# Altium PCB gyro_board.PcbDoc
Units mil, origin at the board's own origin, x right, y up, seen from the top; angles counter-clockwise.
Board outline 444 x 440 mil, 2 copper layers (Top Layer, Bottom Layer); 11 components, 12 nets, 54 pads, 12 vias.
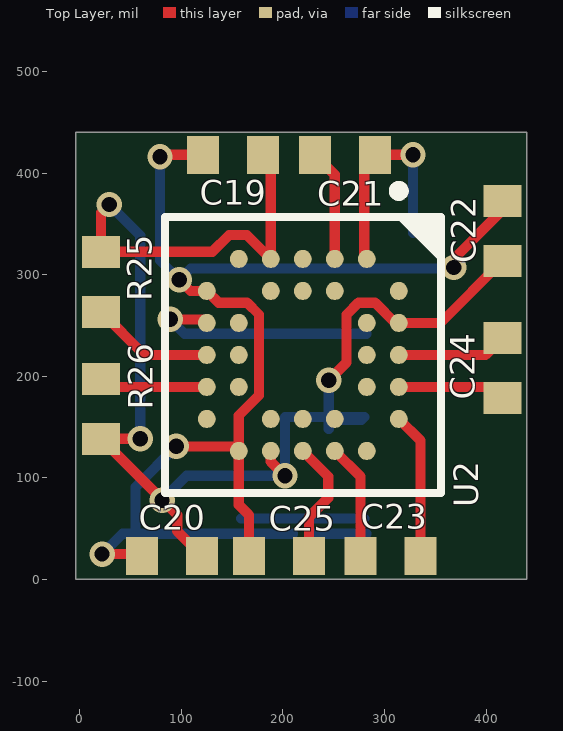
[diagram p0: Top Layer view]
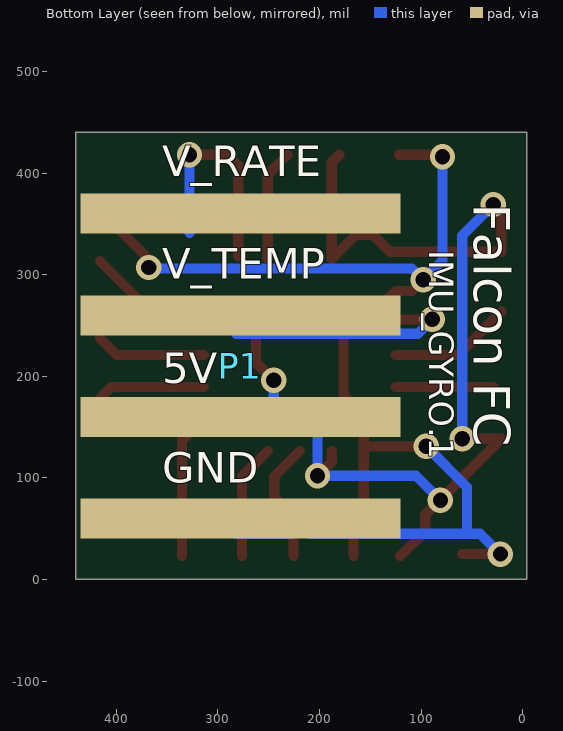
[diagram p1: Bottom Layer view, seen from below]

## Layer stack, top to bottom
Top Layer: signal copper 1.4
Dielectric: dielectric 12.6, FR-4, Dk 4.8
Bottom Layer: signal copper 1.4

## Board outline
440,0 440,440 -4,440 -4,0

## Design rules (kind name [scope] priority, off if disabled: settings)
Clearance [All] p1: gap=6
HoleSize [All] p1: absolutevalues=TRUE maxlimit=100 minlimit=15 maxpercent=80.000 minpercent=20.000
HoleToHoleClearance [All] p1: gap=6 allowstackedmicrovias=TRUE
PlaneConnect [All] p1: planeconnectstyle=Direct reliefexpansion=20 reliefentries=4 reliefconductorwidth=10 reliefairgap=10
PolygonConnect [All] p1: connectstyle=Direct reliefconductorwidth=10 reliefentries=4 polygonreliefangle="90 Angle"
RoomDefinition U_gyro [InComponentClass('U_gyro')] p1: confinementstyle=ConfineIn formatcopy=TRUE lockcomponents=FALSE outline -4,440 -4,0 440,0 440,440
RoomDefinition gyro_board [InComponentClass('gyro_board')] p2: confinementstyle=ConfineIn formatcopy=TRUE lockcomponents=FALSE outline 440,0 440,440 -4,440 -4,0
RoutingVias [All] p1: holewidth=15 width=25 viastyle="Through Hole" minholewidth=15 minwidth=25 maxholewidth=100 maxwidth=200
SilkToSilkClearance [All] p1: silktosilkclearance=0
SilkscreenOverComponentPads [All] p1: minsilkscreentomaskgap=0
SolderMaskExpansion [All] p1: expansion=4
Width [All] p1: maxlimit=100 minlimit=6 preferedwidth=10
23 further rules are at their usual default settings.

## Classes and differential pairs
component class U_gyro: C19 C20 C21 C22 C23 C24 C25 R25 R26 U2
component class gyro_board: P1

## Components (designator, comment, footprint, x,y, rotation, side; value= is the part's Value field where it differs from the comment)
C19 "Capacitor" "0603 (1608)" 151,418 r180 top
C20 "Capacitor" "0603 (1608)" 91,23 r180 top
C21 "Capacitor" "0603 (1608)" 261,418 r0 top
C22 "Capacitor" "0603 (1608)" 416,343 r90 top
C23 "Capacitor" "0603 (1608)" 306,23 r180 top
C24 "Capacitor" "0603 (1608)" 416,208 r270 top
C25 "Capacitor" "0603 (1608)" 196,23 r180 top
P1 "Header 4" gyro_connect 278,360 r270 bottom
R25 "ST Jumper" "0603 (1608)" 21,293 r90 top
R26 "ST Jumper" "0603 (1608)" 21,168 r270 top
U2 "ADXRS620" BGA_AXDR 219.5,220.99 r270 top

## Footprints (in the part's own frame and the unit in brackets; to place one, negate y for a bottom-side part, rotate by r counter-clockwise, add the part's x,y. Pads: shape width x height; smd on the part's side, far side on the other; paste and mask are expansions set on the pad)
"0603 (1608)" [mm] "Chip 2-Leads 0603 (1608)"
  rect 0.8x0.95 smd mask+0: 1(-0.75,0) 2(0.75,0)
  body extent -0.77,-0.43 0.77,0.43, height 0.55
BGA_AXDR [mm] "From AXDRS622 Datasheet"
  round 0.45 smd: A2(-1.6,2.4) A3(-0.8,2.4) A4(0,2.4) A5(0.8,2.4) A6(1.6,2.4) B1(-2.4,1.6) B3(-0.8,1.6) B4(0,1.6) B5(0.8,1.6) B7(2.4,1.6) C1(-2.4,0.8) C2(-1.6,0.8) C6(1.6,0.8) C7(2.4,0.8) D1(-2.4,0) D2(-1.6,0) D6(1.6,0) D7(2.4,0) E1(-2.4,-0.8) E2(-1.6,-0.8) E6(1.6,-0.8) E7(2.4,-0.8) F1(-2.4,-1.6) F3(-0.8,-1.6) F4(0,-1.6) F5(0.8,-1.6) F7(2.4,-1.6) G2(-1.6,-2.4) G3(-0.8,-2.4) G4(0,-2.4) G5(0.8,-2.4) G6(1.6,-2.4)
  silkscreen extent -4.22,-3.45 3.45,3.45, body extent -3.45,-3.45 3.45,3.45, height 3.8
gyro_connect [mm] "the sides of male header pins (100mil pitch) will be soldered to the gyro board to attach it"
  rect 1x8 smd mask+0.051: 1(0,0) 2(2.54,0) 3(5.08,0) 4(7.62,0)

## Part data
P1: "Header, 4-Pin"
R25 R26: library part Res1, "Resistor"

## Via types
v1: diameter 25, hole 15, Top Layer to Bottom Layer, tented both sides, 12 vias

## Nets (pads, with @x,y where several pads share a name; then routed paths per layer and width w, separated by ;. In a path a pad name is that pad's centre, name@x,y a point inside that pad or via, vN(x,y) a via of type N, cw(c..) or ccw(c..) an arc to the next point about the centre after c; other vN are vias at no path point)
5V: C19.1 C20.1 C22.1 P1.3 R25.2 R26.2 U2.A3 U2.E1 U2.E7 | length 1419.1
  Top Layer w10: v1(29,369) 21,361 R25.2 130.53,322.53 147,339 164.49,339 U2.E1 188.01,410.52 C19.1 ; v1(59.47,138.47) R26.2 95.94,63.53 95.94,47.58 C20.1 ; U2.E7 188.01,115.99 v1(202,102) ; v1(245,196) 262.64,213.64 262.64,260.71 274.27,272.35 290.72,272.35 U2.A3@310.58,252.49 ; U2.A3 355.02,252.49 C22.1
  Bottom Layer w10: v1(29,369) 59.47,338.53 v1(59.47,138.47) ; v1(81,78) 105,102 v1(202,102) 202,160 P1.3@245,160 ; P1.3@245,148 P1.3@245,157 ; v1(245,196) P1.3@245,160 ; P1.3@245,157 P1.3@245,160 ; P1.3@245,157 277,157 280,160 P1.3 P1.3@245,160
AGND: C19.2 C20.2 C22.2 C25.2 P1.4 U2.F7 U2.G2 | length 1454.1
  Top Layer w10: v1(22,25) C20.2@59.47,25 ; v1(79,416) 81,418 C19.2 ; v1(95,131) 152.02,131 U2.F7 ; v1(98,295) 109.02,283.98 U2.G2 136.65,272.35 164.74,272.35 176.37,260.71 176.37,181.27 156.51,161.41 U2.F7 ; C25.2 166.47,63.53 156.51,73.49 U2.F7 ; v1(368,307) 368,315.48 416,363.48 C22.2
  Bottom Layer w10: v1(22,25) 42,45 55,45 ; v1(79,416) 79,314 v1(98,295) ; v1(95,131) 55,91 55,45 ; v1@101,292 v1(98,295) ; P1.4@159,60 P1.4 P1.4@280,60 ; P1.4@210,45 55,45 ; P1.4@228,45 P1.4@282,45 ; v1(368,307) 367,306 109,306 v1(98,295)
NetC21_1: C21.1 U2.C1 | length 110.6
  Top Layer w10: C21.1 251,398.47 U2.C1
NetC23_1: C23.1 U2.A6 | length 143.9
  Top Layer w10: U2.A6 335.53,136.46 C23.1
NetC23_2: C23.2 U2.C7 | length 114.1
  Top Layer w10: U2.C7 276.47,101.03 C23.2
NetC24_1: C24.1 U2.A4 | length 108.9
  Top Layer w10: U2.A4 399.46,220.99 C24.1
NetC24_2: C24.2 U2.A5 | length 106.6
  Top Layer w10: U2.A5 404.98,189.5 C24.2
NetC25_1: C25.1 U2.D7 | length 121.8
  Top Layer w10: U2.D7 244.6,101.41 244.6,80.27 225.53,61.19 C25.1
NetR25_1: R25.1 U2.G4 | length 121.6
  Top Layer w10: R25.1 63.48,220.99 U2.G4
NetR26_1: R26.1 U2.G5 | length 96
  Top Layer w10: R26.1@29.03,189.5 U2.G5
V_RATE: C21.2 P1.1 U2.B1 | length 218.9
  Top Layer w10: U2.B1@280,317.98 280,407.47 C21.2 v1(328,418)
  Bottom Layer w10: P1.1@328,341 v1(328,418)
V_TEMP: P1.2 U2.G3 | length 231.4
  Top Layer w10: v1(89,256) U2.G3@121.5,256
  Bottom Layer w10: v1(89,256) 103.15,241.85 P1.2@282,241.85
pads on no net: U2.A2 U2.B3 U2.B4 U2.B5 U2.B7 U2.C2 U2.C6 U2.D1 U2.D2 U2.D6 U2.E2 U2.E6 U2.F1 U2.F3 U2.F4 U2.F5 U2.G6

## Silkscreen, mask and mechanical layers (free items; w line width, h text height)
Bottom Overlay:
  text "V_RATE" at 355,397 h30
  text "Falcon FC" at 48,370 h36 r90
  text "IMU_GYRO.1" at 92,324 h24 r90
  text "V_TEMP" at 355,296 h30
  text "5V" at 355,193 h30
  text "GND" at 355,95 h30